# EAGLE board 4_4 LED LIGHT (EAGLE 9.7.0)

Size 293.54 x 125.16 mm. Coordinates in mm from the lower left corner, seen from the top.
Outline: 0,0 293.54,0 293.54,125.16 0,125.16 0,0
Copper layers (1*16): Top 0.035mm / dielectric 1.5mm / Bottom 0.035mm
Design rules "default": minimum track width 6mil, minimum drill 0.35mm, track to track 6mil, track to pad 6mil, pad to pad 6mil, via to via 6mil, smd to smd 6mil, copper to edge 40mil, drill to drill 6mil, minimum pad ring 10mil, minimum via ring 8mil, stop-mask expansion 4mil, vias tented up to drill 0mil, thermal gap 10mil

## Footprints (pad centres in the part's own frame; a part is rotated, then mirrored left to right if it is on the bottom)
BATTERY-GENERIC = drill 1.118 pad 3.15 octagon: + 2.54,0; - -2.54,0
LEDRD254W60D565H860B = drill 0.981 pad 1.581: 1 -1.27,0; 2 1.27,0
ARDUINO-UNO-R3-SHIELD = drill 1.016 pad 1.88: 3.3V 24.13,-2.54; 5V 24.13,0; A0 24.13,12.7; A1 24.13,15.24; A2 24.13,17.78; A3 24.13,20.32; A4 24.13,22.86; A5 24.13,25.4; AREF -24.13,-13.97; D2 -24.13,20.32; D3 -24.13,17.78; D4 -24.13,15.24; D5 -24.13,12.7; D6 -24.13,10.16; D7 -24.13,7.62; D8 -24.13,3.81; D9 -24.13,1.27; D10 -24.13,-1.27; D11 -24.13,-3.81; D12 -24.13,-6.35; D13 -24.13,-8.89; GND@0 24.13,2.54; GND@1 24.13,5.08; GND@2 -24.13,-11.43; IOREF 24.13,-7.62; NC 24.13,-10.16; RES 24.13,-5.08; RX -24.13,25.4; SCL -24.13,-19.05; SDA -24.13,-16.51; TX -24.13,22.86; VIN 24.13,7.62

## Placement (x,y rotation side)
BAT1  9V  [BATTERY-GENERIC]  284.08,116.9 270 top
BAT2  9V  [BATTERY-GENERIC]  285.28,79.04 270 top
BAT3  9V  [BATTERY-GENERIC]  284.78,91.8 270 top
BAT4  9V  [BATTERY-GENERIC]  284.57,104.9 270 top
D1  RED  [LEDRD254W60D565H860B]  16.16,116.14 180 top
D2  RED  [LEDRD254W60D565H860B]  24.72,116.51 180 top
D3  RED  [LEDRD254W60D565H860B]  32.05,116.33 180 top
D4  RED  [LEDRD254W60D565H860B]  8.81,105.8 180 top
D5  RED  [LEDRD254W60D565H860B]  8.23,115.64 180 top
D6  RED  [LEDRD254W60D565H860B]  9.01,95.83 180 top
D7  RED  [LEDRD254W60D565H860B]  9.01,85.3 180 top
D8  RED  [LEDRD254W60D565H860B]  16.72,105.61 180 top
D9  RED  [LEDRD254W60D565H860B]  16.35,95.08 180 top
D10  RED  [LEDRD254W60D565H860B]  15.97,84.92 180 top
D11  RED  [LEDRD254W60D565H860B]  24.62,105.42 180 top
D12  RED  [LEDRD254W60D565H860B]  31.95,105.8 180 top
D13  RED  [LEDRD254W60D565H860B]  24.43,94.89 180 top
D14  RED  [LEDRD254W60D565H860B]  31.95,94.51 180 top
D15  RED  [LEDRD254W60D565H860B]  24.43,84.74 180 top
D16  RED  [LEDRD254W60D565H860B]  32.5,84.44 180 top
D17  RED  [LEDRD254W60D565H860B]  6.06,60.48 180 top
D18  RED  [LEDRD254W60D565H860B]  13.99,60.98 180 top
D19  RED  [LEDRD254W60D565H860B]  22.54,61.35 180 top
D20  RED  [LEDRD254W60D565H860B]  29.88,61.16 180 top
D21  RED  [LEDRD254W60D565H860B]  6.64,50.64 180 top
D22  RED  [LEDRD254W60D565H860B]  6.84,40.67 180 top
D23  RED  [LEDRD254W60D565H860B]  6.84,30.14 180 top
D24  RED  [LEDRD254W60D565H860B]  14.55,50.45 180 top
D25  RED  [LEDRD254W60D565H860B]  14.17,39.92 180 top
D26  RED  [LEDRD254W60D565H860B]  13.8,29.76 180 top
D27  RED  [LEDRD254W60D565H860B]  22.45,50.26 180 top
D28  RED  [LEDRD254W60D565H860B]  29.78,50.64 180 top
D29  RED  [LEDRD254W60D565H860B]  22.26,39.73 180 top
D30  RED  [LEDRD254W60D565H860B]  29.78,39.35 180 top
D31  RED  [LEDRD254W60D565H860B]  22.26,29.58 180 top
D32  RED  [LEDRD254W60D565H860B]  30.33,29.28 180 top
D33  RED  [LEDRD254W60D565H860B]  55.64,111.66 180 top
D34  RED  [LEDRD254W60D565H860B]  62.83,111.83 180 top
D35  RED  [LEDRD254W60D565H860B]  71.39,112.2 180 top
D36  RED  [LEDRD254W60D565H860B]  78.72,112.02 180 top
D37  RED  [LEDRD254W60D565H860B]  55.69,101.49 180 top
D38  RED  [LEDRD254W60D565H860B]  55.69,91.52 180 top
D39  RED  [LEDRD254W60D565H860B]  55.69,80.99 180 top
D40  RED  [LEDRD254W60D565H860B]  63.4,101.3 180 top
D41  RED  [LEDRD254W60D565H860B]  63.02,90.77 180 top
D42  RED  [LEDRD254W60D565H860B]  62.64,80.61 180 top
D43  RED  [LEDRD254W60D565H860B]  71.29,101.11 180 top
D44  RED  [LEDRD254W60D565H860B]  78.63,101.49 180 top
D45  RED  [LEDRD254W60D565H860B]  71.1,90.58 180 top
D46  RED  [LEDRD254W60D565H860B]  78.63,90.2 180 top
D47  RED  [LEDRD254W60D565H860B]  71.1,80.43 180 top
D48  RED  [LEDRD254W60D565H860B]  78.06,80.24 180 top
D49  RED  [LEDRD254W60D565H860B]  53.46,56.49 180 top
D50  RED  [LEDRD254W60D565H860B]  60.66,56.67 180 top
D51  RED  [LEDRD254W60D565H860B]  69.21,57.04 180 top
D52  RED  [LEDRD254W60D565H860B]  76.55,56.86 180 top
D53  RED  [LEDRD254W60D565H860B]  53.51,46.33 180 top
D54  RED  [LEDRD254W60D565H860B]  53.51,36.36 180 top
D55  RED  [LEDRD254W60D565H860B]  53.51,25.83 180 top
D56  RED  [LEDRD254W60D565H860B]  61.22,46.14 180 top
D57  RED  [LEDRD254W60D565H860B]  60.85,35.61 180 top
D58  RED  [LEDRD254W60D565H860B]  60.47,25.45 180 top
D59  RED  [LEDRD254W60D565H860B]  69.12,45.95 180 top
D60  RED  [LEDRD254W60D565H860B]  76.45,46.33 180 top
D61  RED  [LEDRD254W60D565H860B]  68.93,35.42 180 top
D62  RED  [LEDRD254W60D565H860B]  76.45,35.04 180 top
D63  RED  [LEDRD254W60D565H860B]  68.93,25.27 180 top
D64  RED  [LEDRD254W60D565H860B]  75.89,25.08 180 top
U2  ARDUINO-UNO-R3-SHIELD  [ARDUINO-UNO-R3-SHIELD]  209.3,29.84 270 top

## Library data of the parts
BAT1-BAT4 U2 = Tinkercad
D1-D64 = Tinkercad; CATEGORY: Opto-Electronic; SUB-CATEGORY: LED; VALUE: LED_RED

## Nets
BAT1-: BAT1.- U2.GND@0 U2.GND@1 U2.GND@2
BAT2+: BAT2.+ U2.5V
BAT3+: BAT2.- BAT3.+
BAT4+: BAT3.- BAT4.+
BAT4-: BAT1.+ BAT4.-
D5_A: D5.1 D33.1
U2_A0: D33.2 D34.2 D35.2 D36.2 D37.2 D38.2 D39.2 D40.2 D41.2 D42.2 D43.2 D44.2 D45.2 D46.2 D47.2 D48.2 U2.A0
U2_A1: D1.2 D2.2 D3.2 D4.2 D5.2 D6.2 D7.2 D8.2 D9.2 D10.2 D11.2 D12.2 D13.2 D14.2 D15.2 D16.2 U2.A1
U2_A2: D49.2 D50.2 D51.2 D52.2 D53.2 D54.2 D55.2 D56.2 D57.2 D58.2 D59.2 D60.2 D61.2 D62.2 D63.2 D64.2 U2.A2
U2_A3: D17.2 D18.2 D19.2 D20.2 D21.2 D22.2 D23.2 D24.2 D25.2 D26.2 D27.2 D28.2 D29.2 D30.2 D31.2 D32.2 U2.A3
U2_A4: D7.1 D23.1 D39.1 D55.1 U2.A4
U2_A5: D6.1 D22.1 D38.1 D54.1 U2.A5
U2_D2: D10.1 D26.1 D42.1 D58.1 U2.D2
U2_D3: D9.1 D25.1 D41.1 D57.1 U2.D3
U2_D4: D8.1 D24.1 D40.1 D56.1 U2.D4
U2_D5: D1.1 D18.1 D34.1 D50.1 U2.D5
U2_D6: D15.1 D31.1 D47.1 D63.1 U2.D6
U2_D7: D13.1 D29.1 D45.1 D61.1 U2.D7
U2_D8: D11.1 D27.1 D43.1 D59.1 U2.D8
U2_D9: D2.1 D19.1 D35.1 D51.1 U2.D9
U2_D10: D16.1 D32.1 D48.1 D64.1 U2.D10
U2_D11: D14.1 D30.1 D46.1 D62.1 U2.D11
U2_D12: D12.1 D28.1 D44.1 D60.1 U2.D12
U2_D13: D3.1 D20.1 D36.1 D52.1 U2.D13
U2_RX: D4.1 D21.1 D37.1 D53.1 U2.RX
U2_TX: D5.1 D17.1 D33.1 D49.1 U2.TX

## Tracks (layer width: path | path; a pad name or v marks a point on that pad's centre or on a via)
BAT1-  (3 unrouted)
BAT2+  (1 unrouted)
BAT3+  (1 unrouted)
BAT4+  (1 unrouted)
BAT4-  (1 unrouted)
D5_A  (1 unrouted)
U2_A0  (16 unrouted)
U2_A1  (16 unrouted)
U2_A2  (16 unrouted)
U2_A3  (16 unrouted)
U2_A4  (4 unrouted)
U2_A5  (4 unrouted)
U2_D2  (4 unrouted)
U2_D3  (4 unrouted)
U2_D4  (4 unrouted)
U2_D5  (4 unrouted)
U2_D6  (4 unrouted)
U2_D7  (4 unrouted)
U2_D8  (4 unrouted)
U2_D9  (4 unrouted)
U2_D10  (4 unrouted)
U2_D11  (4 unrouted)
U2_D12  (4 unrouted)
U2_D13  (4 unrouted)
U2_RX  (4 unrouted)
U2_TX  (4 unrouted)